# EAGLE board DEPDisc horizontal electrodes 100µm v4 (EAGLE 9.7.0)
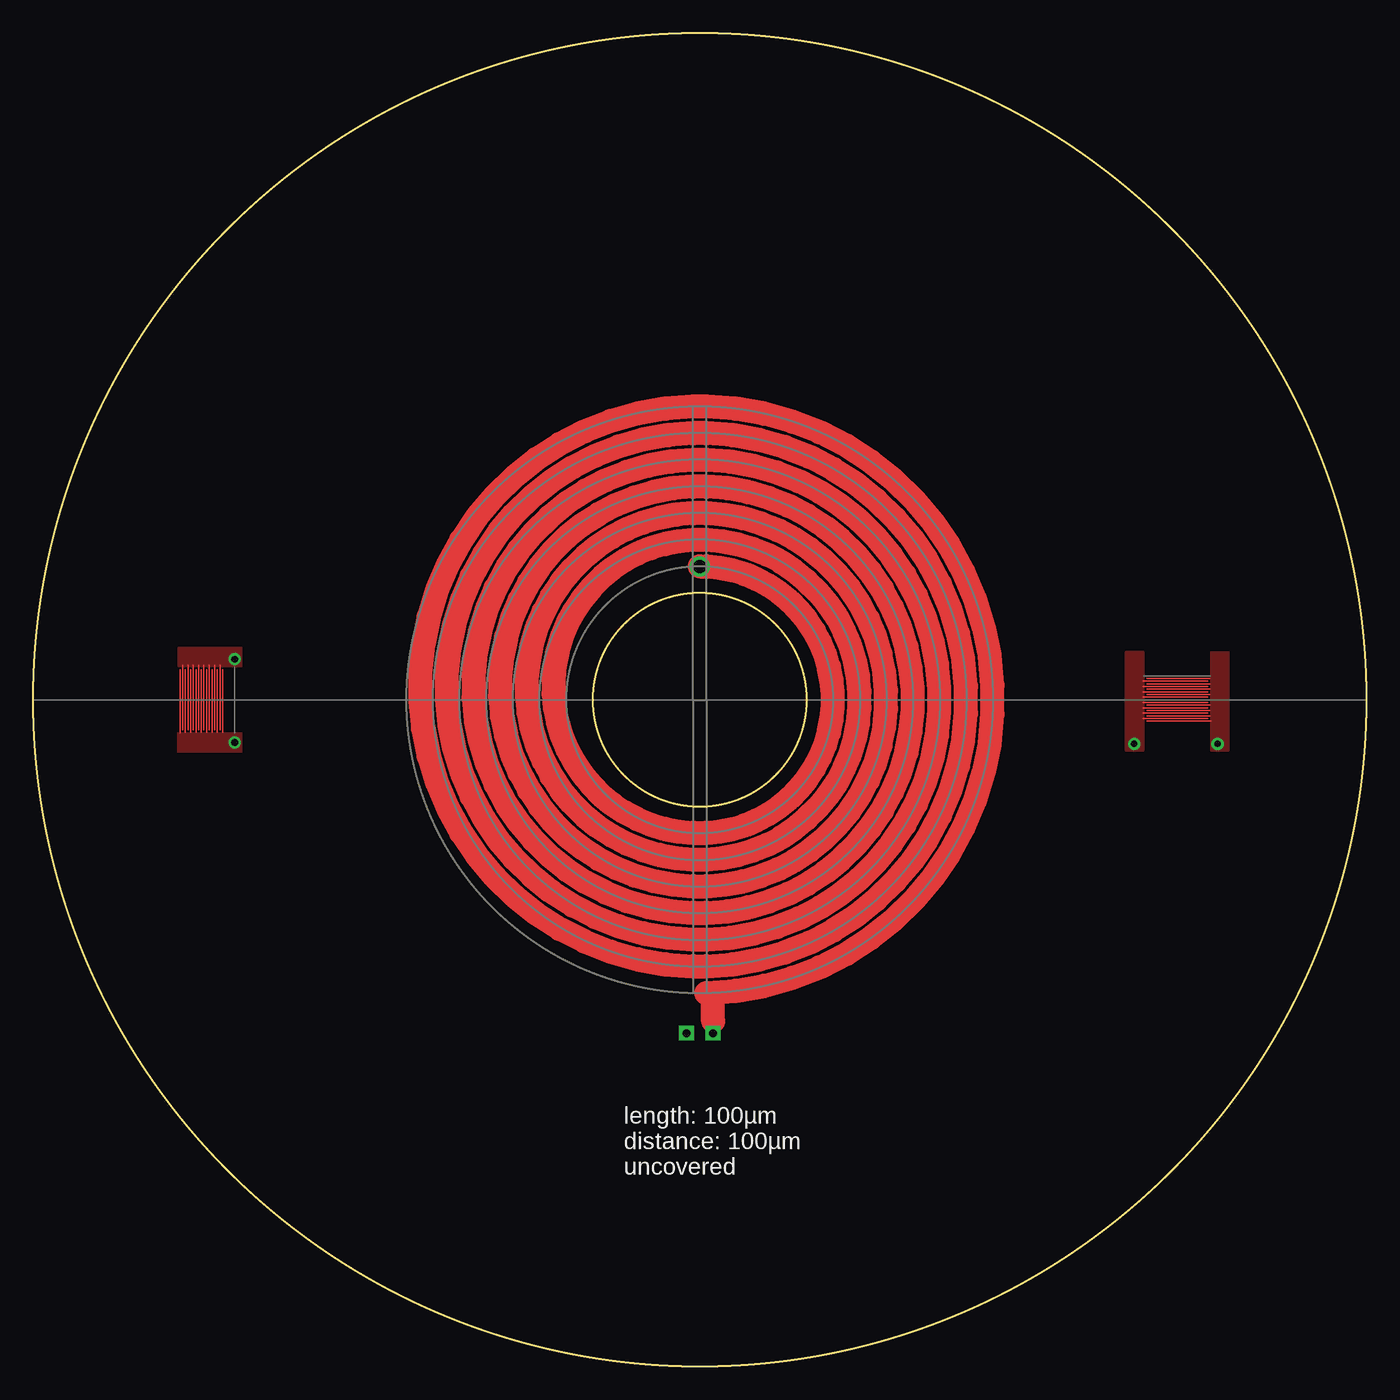
[diagram p0: board, top side]
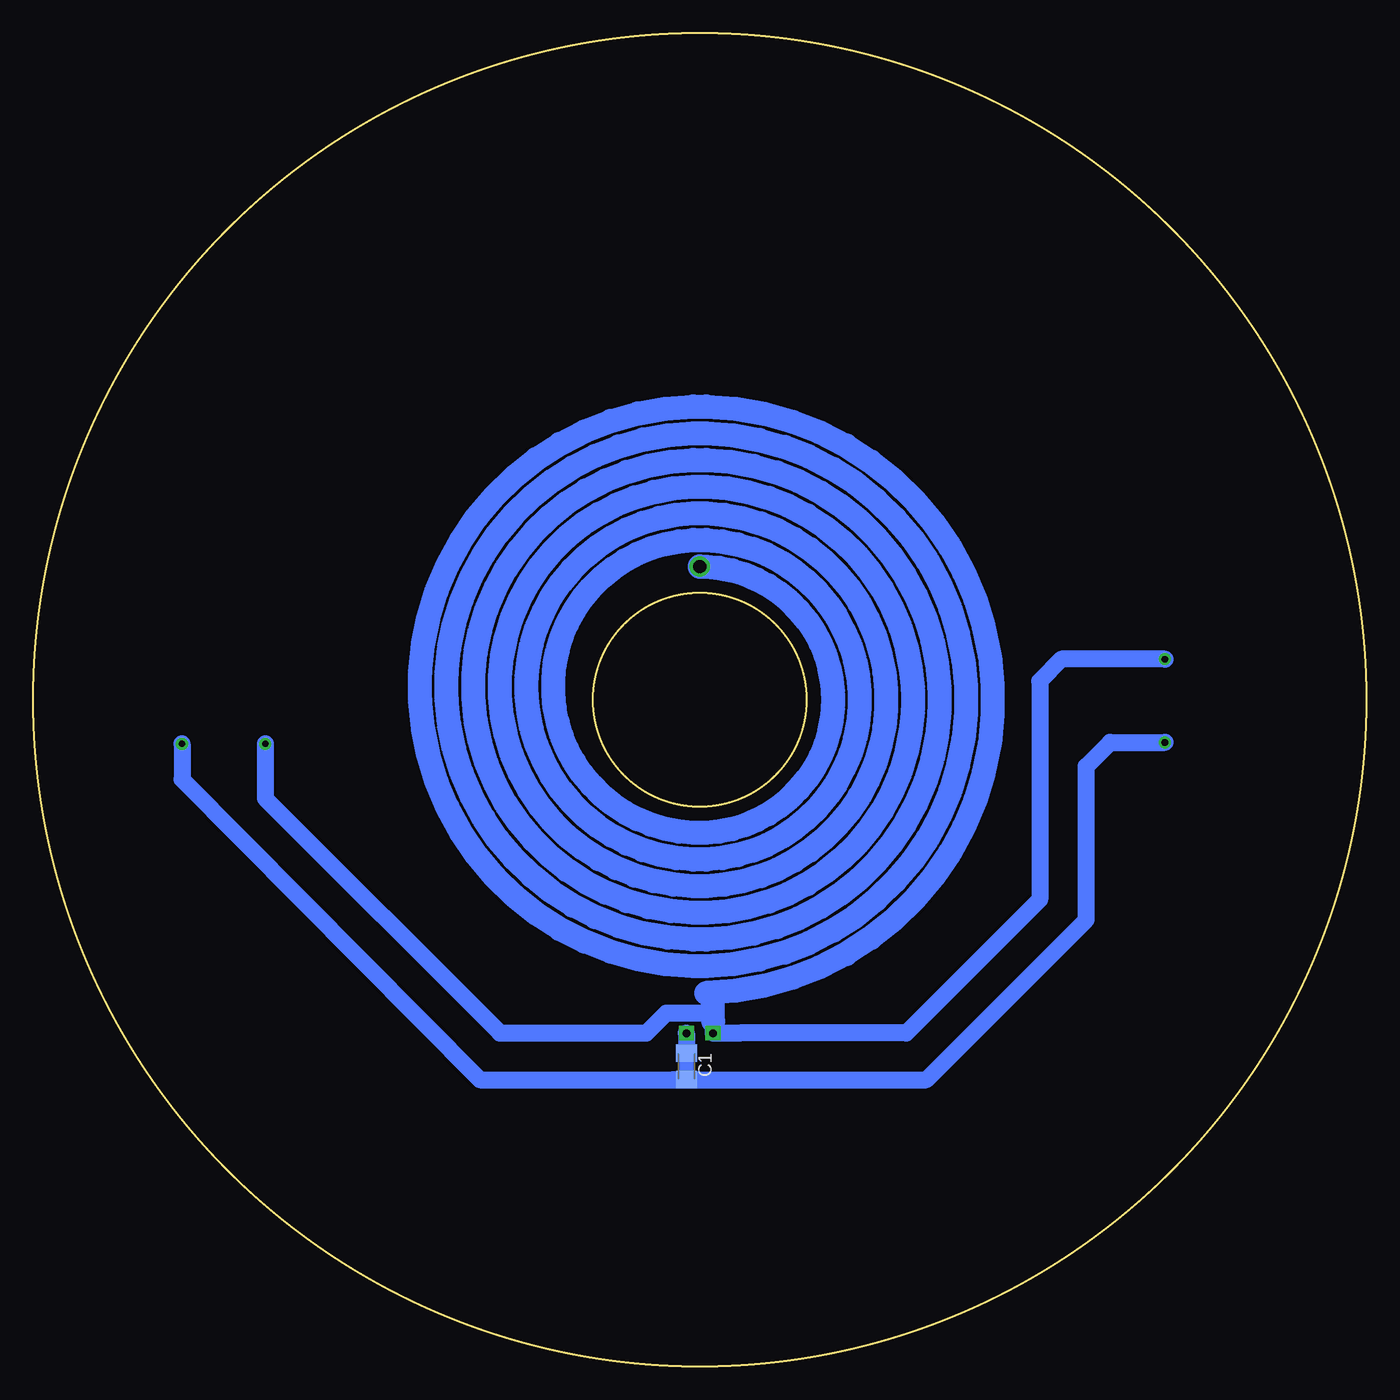
[diagram p1: board, bottom side, seen from below]

Size 100 x 100 mm. Coordinates in mm from the lower left corner, seen from the top.
Outline: circle at 50,50 radius 50
Outline: circle at 50,50 radius 8
Copper layers (1*16): Top 0.035mm / dielectric 1.5mm / Bottom 0.035mm
Design rules "Fusion Electronics Design Rules": minimum track width 6mil, minimum drill 0.35mm, track to track 0.05mm, track to pad 6mil, pad to pad 6mil, via to via 6mil, smd to smd 6mil, copper to edge 40mil, drill to drill 6mil, minimum pad ring 10mil, minimum via ring 8mil, stop-mask expansion 4mil, vias tented up to drill 0mil, thermal gap 10mil

## Footprints (pad centres in the part's own frame; a part is rotated, then mirrored left to right if it is on the bottom)
C0805K = smd 1.3 x 1.6: 1 -1,0; 2 1,0
COIL_22_10_1.8 = drill 0.6 square: P$1 -1,25.02; P$2 1,25.02 | drill 1: P$3 0,-10

## Placement (x,y rotation side)
C1  [C0805K]  51,22.5 270 bottom
U$3  COIL_22_10_1.8  [COIL_22_10_1.8]  50,50 180 top

## Library data of the parts
C1 = resistor
U$3 = Trace_Coils

## Nets
E1: U$3.P$2
E2: C1.1 C1.2 U$3.P$1

## Tracks (layer width: path | path; a pad name or v marks a point on that pad's centre or on a via)
E1  (via drill 0.5)
  Top 0.1: 14,52.59 14,47.71 | 12.4,52.59 12.4,47.71 | 12.8,52.59 12.8,47.71 | 13.2,52.59 13.2,47.71 | 13.6,52.59 13.6,47.71 | 11.2,52.59 11.2,47.71 | 11.6,52.59 11.6,47.71 | 12,52.59 12,47.71 | 83.23,51.4 88.11,51.4 | 83.23,49.8 88.11,49.8 | 83.23,50.2 88.11,50.2 | 83.23,50.6 88.11,50.6 | 83.23,51 88.11,51 | 83.23,48.6 88.11,48.6 | 83.23,49 88.11,49 | 83.23,49.4 88.11,49.4
  Bottom 1.27: v15.11,53.05 22.85,53.05 24.5,51.4 24.5,35.01 34.51,25 47,25 47.02,24.98 U$3.P$2 49,26 49.5,26.5 52.5,26.5 54,25 64.99,25 82.6,42.61 v82.6,46.69
  pour Top: 10.88,52.51 15.64,52.51 15.64,53.89 10.88,53.89
  pour Top: 81.94,46.21 83.31,46.21 83.31,53.57 81.94,53.57
E2  (via drill 0.5)
  Top 0.1: 14.2,47.56 14.2,52.29 | 12.6,47.56 12.6,52.29 | 13,47.56 13,52.29 | 13.4,47.56 13.4,52.29 | 13.8,47.56 13.8,52.29 | 11.4,47.56 11.4,52.29 | 11.8,47.56 11.8,52.29 | 12.2,47.56 12.2,52.29 | 11,47.5 11,52.29 | 88.26,51.6 83.54,51.6 | 88.26,50 83.54,50 | 88.26,50.4 83.54,50.4 | 88.26,50.8 83.54,50.8 | 88.26,51.2 83.54,51.2 | 88.26,48.8 83.54,48.8 | 88.26,49.2 83.54,49.2 | 88.26,49.6 83.54,49.6 | 88.33,48.4 83.54,48.4
  Bottom 1.27: v15.11,46.8 19.2,46.8 21,45 21,33.5 33,21.5 50.5,21.5 C1.2 | U$3.P$1 51,23.48 C1.1 C1.2 | v88.85,46.69 88.85,44.02 66.5,21.5 51.98,21.5 C1.2
  pour Top: 10.83,46.11 15.64,46.11 15.64,47.49 10.83,47.49
  pour Top: 88.34,46.21 89.71,46.21 89.71,53.54 88.34,53.54

## Text on the board
tNames: length: 100µm / distance: 100µm / uncovered